# Allegro board PoFA1-2.brd
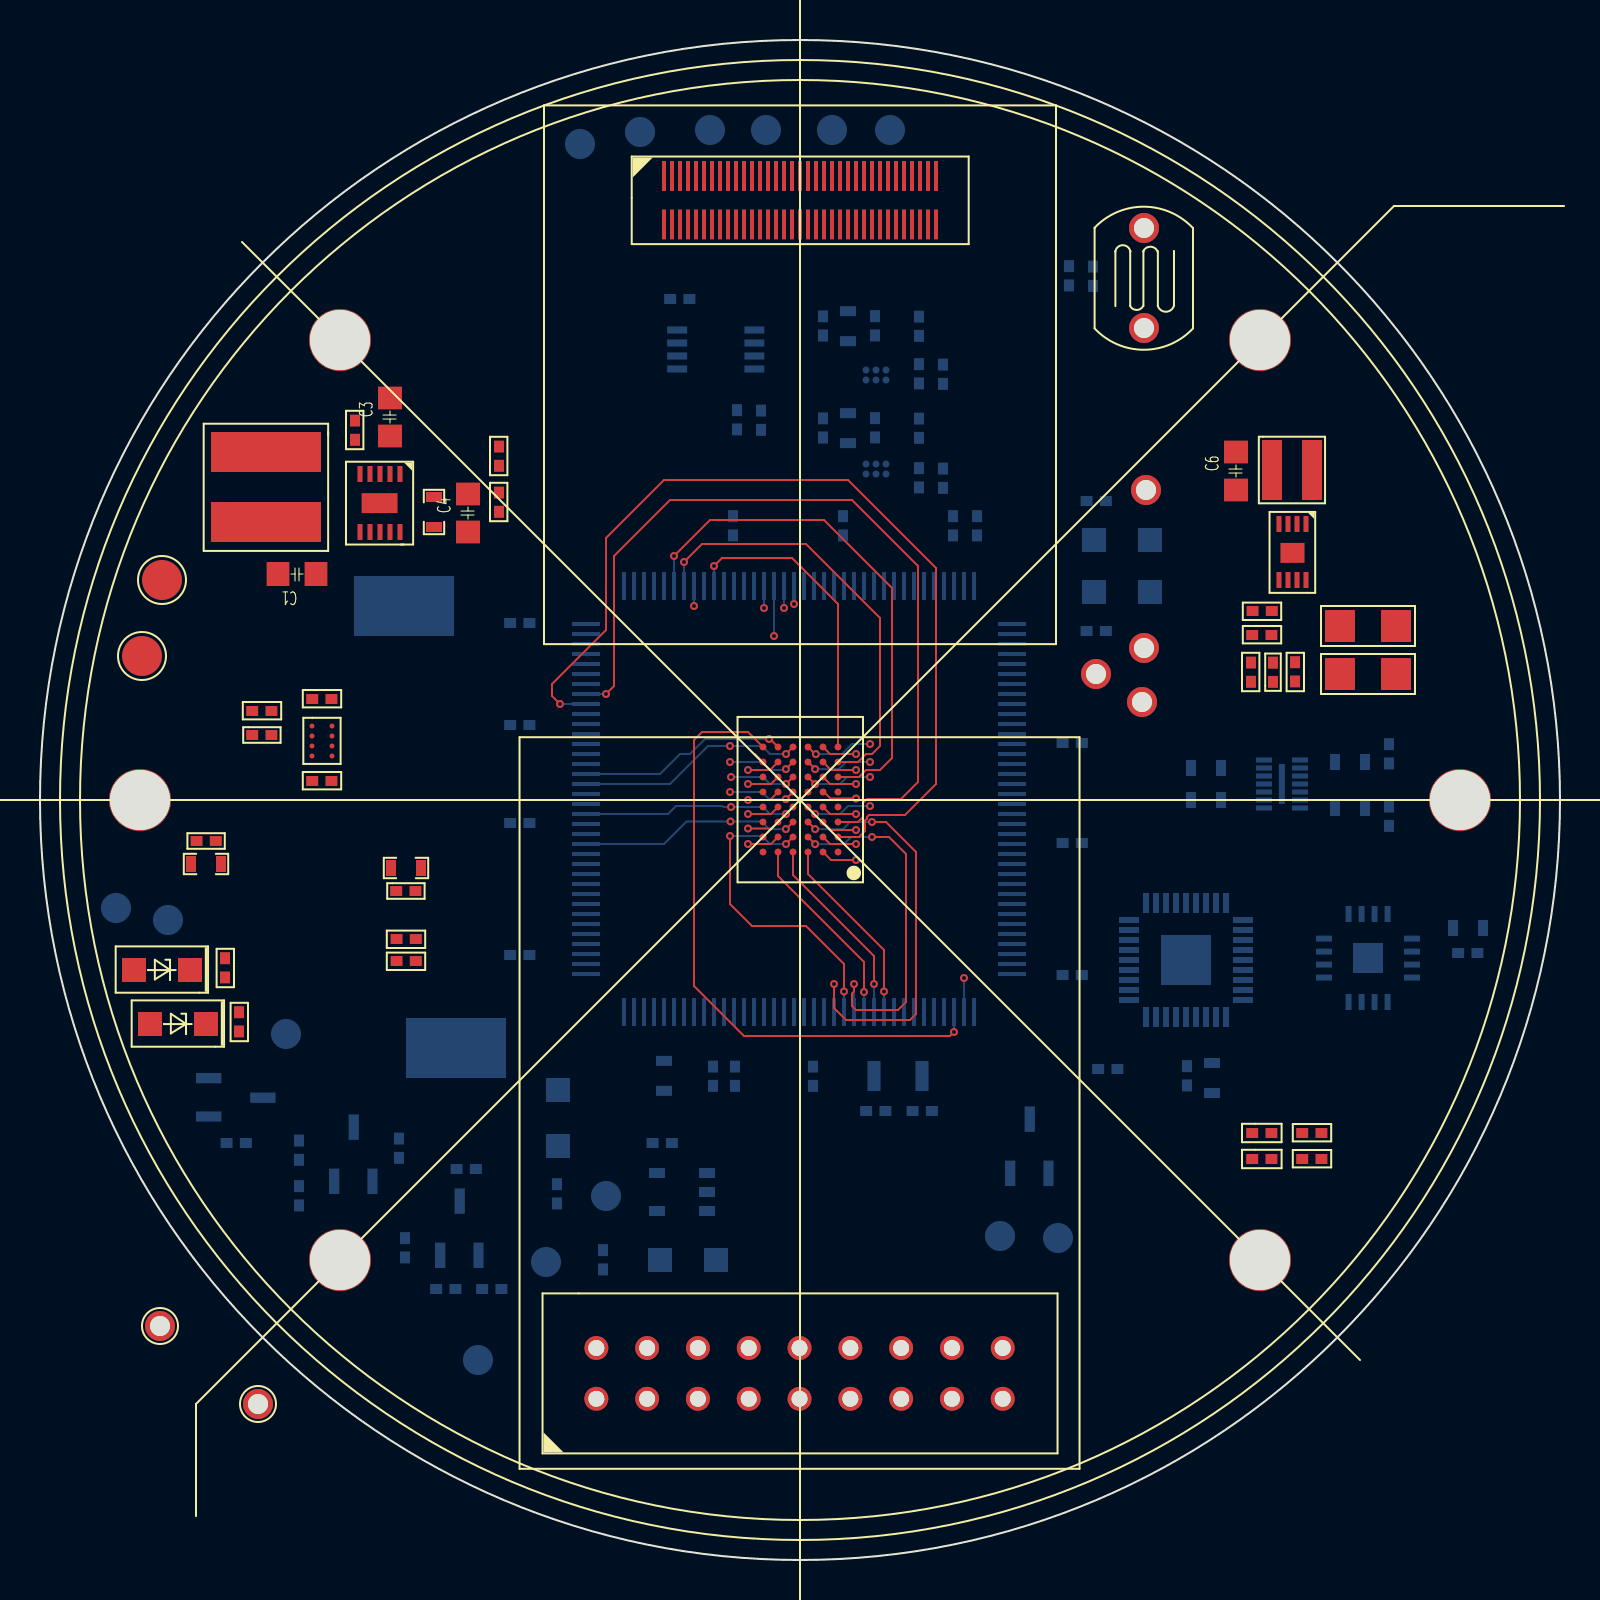
[diagram p0: board, top side]
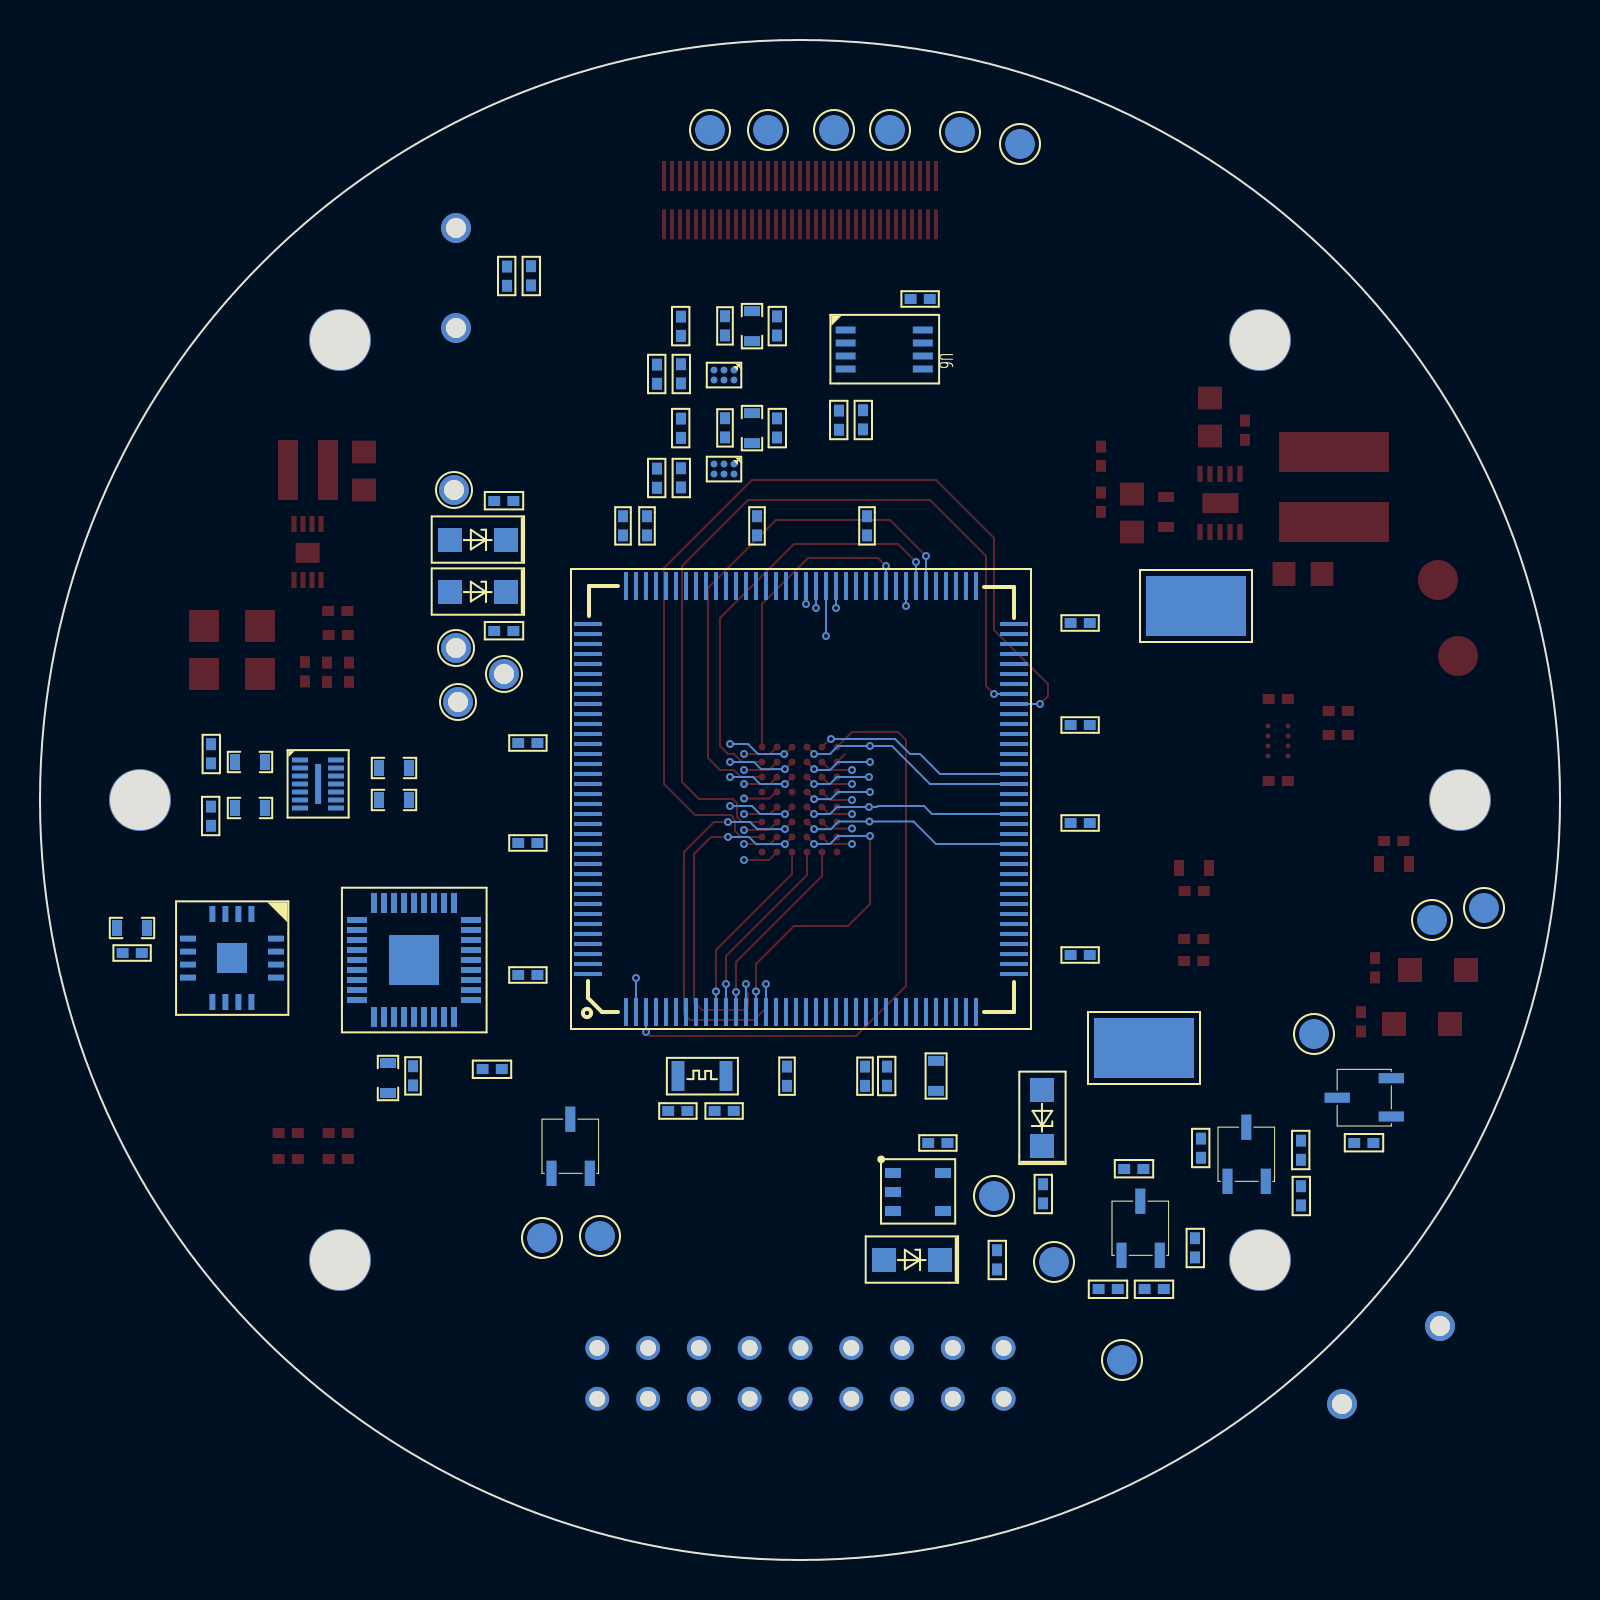
[diagram p1: board, bottom side, seen from below]

Outline 76 x 76 mm; copper layers: TOP, GND, VCC, BOTTOM. Coordinates in mm from the lower left corner of the outline.
Outline path: circle c38,38 r38

## Design rules (mm)
constraint set DEFAULT: min track width 0.1

## Placement (name value [footprint] x y rotation side)
C1  10uF  [C0805]  13.9 49.9 180 top
C2  1uF  [C0603]  20.1 51.6 90 top
C3  10uF  [C0805]  18.1 56.1 90 top
C4  10uF  [C0805]  22 51.3 90 top
C6  10uF  [C0805]  60.4 53.4 90 top
C7  33pF  [C0402]  61.9 43.89 90 top
C8  22uF  [C1206]  64.8 45.9 0 top
C9  22uF  [C1206]  64.8 43.5 0 top
C10  0.1uF  [C0402]  31.5 63.3 0 bottom
C11  2.2uF  [C0603]  40.8 62.5 270 bottom
C12  0.1uF  [C0402]  42 62.2 270 bottom
C13  1uF  [C0603]  66.3 39.5 180 bottom
C14  1uF  [C0603]  66.3 37.2 180 bottom
C15  1uF  [C0603]  59.1 39.2 180 bottom
C16  1uF  [C0603]  59.1 37.6 180 bottom
C17  2.2uF  [C0603]  40.8 57.39 270 bottom
C18  0.1uF  [C0402]  42 57.1 270 bottom
C19  10uF  [C0603]  9.1 35.2 180 top
C20  0.1uF  [C0402]  8.8 36.2 180 top
C21  0.1uF  [C0402]  17.8 33.2 0 top
C22  10uF  [C0603]  17.5 34.2 0 top
C23  0.1uF  [C0402]  57.6 24.7 270 bottom
C24  10uF  [C0603]  59 24.9 270 bottom
C25  0.1uF  [C0402]  31.6 20.6 180 bottom
C26  0.1uF  [C0402]  70.9 30.6 0 bottom
C27  10uF  [C0603]  70.6 32 0 bottom
C28  0.1uF  [C0402]  38.4 23.7 90 bottom
C29  0.1uF  [C0402]  52.1 29 180 bottom
C30  0.1uF  [C0402]  52.1 35.6 180 bottom
C31  0.1uF  [C0402]  52.1 40.6 180 bottom
C32  0.1uF  [C0402]  23.5 30.5 0 bottom
C33  0.1uF  [C0402]  23.5 37.1 0 bottom
C34  0.1uF  [C0402]  23.5 42 0 bottom
C35  0.1uF  [C0402]  23.5 47.1 0 bottom
C36  0.1uF  [C0402]  34.9 52.2 270 bottom
C37  0.1uF  [C0402]  40.4 52.2 270 bottom
C38  0.1uF  [C0402]  47.1 52.2 270 bottom
C39  0.1uF  [C0402]  45.9 52.2 270 bottom
C40  0.1uF  [C0402]  34.5 23.7 90 bottom
C41  12pF  [C0402]  41.3 22.7 0 bottom
C42  12pF  [C0402]  44.6 22.2 180 bottom
C43  0.1uF  [C0402]  10.6 41 0 top
D1  LED  [LED0402]  60.6 21.1 0 top
D2  LED  [LED0402]  60.6 19.8 0 top
D3  PTVS3V3S1UTR  [SOD123W]  31 15 0 bottom
D4  PTVS3V3S1UTR  [SOD123W]  25.9 20.7 90 bottom
D5  PTVS3V3S1UTR  [SOD123W]  8.3 26.8 180 top
D6  PTVS3V3S1UTR  [SOD123W]  7.5 29.5 180 top
D7  PTVS3V3S1UTR  [SOD123W]  52.7 51 0 bottom
D8  PTVS3V3S1UTR  [SOD123W]  52.7 48.4 0 bottom
J1  Header2x9-2.54mm  [HEADER2X9-2D54]  27.82 10.6 0 top
J2  DF40HC(3.0)-70DS-0.4V(51)  [DF40HC-70DS]  31.2 69.2 0 top
L1  10uH  [L47473]  11.3 55.4 270 top
L2  4.7uH  [L3015]  61.6 54.5 0 top
L3  1uH  [L0603]  31.6 25.01 270 bottom
NOREF  -  [unnamed]  5 38 0 top
NOREF#2  -  [unnamed]  15 15 0 top
NOREF#3  -  [unnamed]  71 38 0 top
NOREF#4  -  [unnamed]  15 61 0 top
NOREF#5  -  [unnamed]  61 61 0 top
NOREF#6  -  [unnamed]  61 15 0 top
Q1  2SC1815  [SOT23-3]  17.1 18.5 180 bottom
Q2  2SC1815  [SOT23-3]  22.4 14.8 180 bottom
Q3  FH3415A  [SOT23-3]  8 21.7 90 bottom
R1  200K  [R0402]  16 56 90 top
R2  2.26M  [R0402]  23.2 52.4 90 top
R3  1M  [R0402]  23.2 54.7 90 top
R4  10K  [R0402]  60.6 46 0 top
R5  562K  [R0402]  60.8 43.9 90 top
R6  1M  [R0402]  62.5 44.9 270 top
R8  1M  [R0402]  35.1 57.5 270 bottom
R9  1M  [R0402]  35.8 56.5 90 bottom
R10  36K  [R0402]  43.7 61.2 90 bottom
R11  10K  [R0402]  44.9 58.8 90 bottom
R12  147K  [R0402]  44.2 59.8 270 bottom
R13  3.3K  [R0402]  39.4 62.2 270 bottom
R14  100K  [R0402]  67.7 40.8 270 bottom
R15  100K  [R0402]  67.2 36.7 90 bottom
R17  GL7549  [AXIAL-5D0]  55.2 61.6 90 top
R19  3.3K  [R0402]  39.4 57.09 270 bottom
R20  10K  [R0402]  44.9 53.6 90 bottom
R21  36K  [R0402]  43.7 56.09 90 bottom
R22  147K  [R0402]  44.2 54.6 270 bottom
R23  10K  [R0402]  61.6 47.7 180 top
R24  1K  [R0402]  52.9 24.8 0 bottom
R25  510  [R0402]  13.2 18.7 270 bottom
R26  510  [R0402]  12.7 20 90 bottom
R27  40  [R0402]  18.5 16.1 270 bottom
R28  510  [R0402]  22.1 13.8 0 bottom
R29  510  [R0402]  19.8 13.8 0 bottom
R30  40  [R0402]  17.7 20.1 90 bottom
R31  510  [R0402]  21.8 19.3 180 bottom
R32  68K  [R0402]  51.7 64.7 270 bottom
R33  0  [R0402]  52.4 63.7 90 bottom
R34  0  [R0402]  18.8 31.3 180 top
R35  DNP  [R0402]  18.8 30.2 180 top
R36  2K  [R0402]  63.1 21.1 0 top
R37  2K  [R0402]  63.1 19.8 0 top
R38  10K  [R0402]  28.4 15.5 270 bottom
R39  10K  [R0402]  26.1 18.8 270 bottom
R40  10K  [R0402]  33.4 23.7 90 bottom
R41  10K  [R0402]  10.6 42.2 0 top
R42  10K  [R0402]  13.6 42.8 0 top
R43  10K  [R0402]  13.6 38.7 0 top
R44  10K  [R0402]  9.7 27.4 270 top
R45  10K  [R0402]  9 30.1 270 top
R46  10K  [R0402]  53.3 46.2 180 bottom
R47  10K  [R0402]  53.3 52.7 180 bottom
R48  10K  [R0402]  10.3 20.6 180 bottom
TP1  Solar Cell V+  [TP_SMD_OD2D0]  6.1 49 0 top
TP2  Solar Cell V-  [TP_SMD_OD2D0]  5.1 45.2 0 top
TP3  LED+  [TP_THR_ID1D0]  6 11.7 0 top
TP4  LED-  [TP_THR_ID1D0]  10.9 7.8 0 top
TP5  SMD TP  [TP_SMD_OD1D5]  25.3 14.9 180 bottom
TP6  SMD TP  [TP_SMD_OD1D5]  28.3 18.2 180 bottom
TP7  SMD TP  [TP_SMD_OD1D5]  21.9 10 180 bottom
TP8  SMD TP  [TP_THR_ID1D0]  52.8 44.3 180 bottom
TP9  SMD TP  [TP_THR_ID1D0]  55.2 45.6 180 bottom
TP10  SMD TP  [TP_THR_ID1D0]  55.3 53.5 180 bottom
TP11  SMD TP  [TP_THR_ID1D0]  55.1 42.9 180 bottom
TP12  SMD TP  [TP_SMD_OD1D5]  48 16.2 180 bottom
TP13  SMD TP  [TP_SMD_OD1D5]  50.9 16.1 180 bottom
TP14  SMD TP  [TP_SMD_OD1D5]  12.3 26.3 180 bottom
TP15  SMD TP  [TP_SMD_OD1D5]  6.4 32 180 bottom
TP16  SMD TP  [TP_SMD_OD1D5]  3.8 32.6 180 bottom
TP17  SMD TP  [TP_SMD_OD1D5]  27 70.8 180 bottom
TP18  SMD TP  [TP_SMD_OD1D5]  30 71.4 180 bottom
TP19  SMD TP  [TP_SMD_OD1D5]  33.5 71.5 180 bottom
TP20  SMD TP  [TP_SMD_OD1D5]  36.3 71.5 180 bottom
TP21  SMD TP  [TP_SMD_OD1D5]  39.6 71.5 180 bottom
TP22  SMD TP  [TP_SMD_OD1D5]  42.5 71.5 180 bottom
TP23  SOLDER POINT  [TP_SMD_3D0X5D0]  18.2 47.7 90 bottom
TP24  SOLDER POINT  [TP_SMD_3D0X5D0]  20.8 25.6 270 bottom
U1  LTC3105EDD#PBF  [DFN-10]  18 51.4 180 top
U2  LTC3539EDCB#PBF  [DFN-8]  63.3 49 180 top
U4  ADCMP380-1ACBZ-RL7  [WLCSP-6]  41.3 59.5 270 bottom
U5  TPS22976ADPUR  [WSON-14]  61.2 40 270 bottom
U6  ADA4051-2ARMZ  [RM-8]  32.1 61.5 270 bottom
U7  ADCMP380-1ACBZ-RL7  [WLCSP-6]  41.3 54.8 270 bottom
U8  IS66WVE2M16EBLL-70BLI-TR  [TFBGA-48]  39.9 35.4 180 top
U9  STM32L496ZGT6  [LQFP-144]  47.9 28.1 180 bottom
U10  MAX4761ETX+T  [TQFN-36]  57.3 30 90 bottom
U11  SN74LVC1G08QDBVRQ1  [SOT-23-5]  33.6 16.9 180 bottom
U13  BAT754C  [SOT23-3]  50.9 18.9 180 bottom
U14  HDC1010YPAR  [DSBGA-8]  13.6 41.7 0 top
U15  MAX4754AEBE+T  [QFN-16]  66.4 30.1 270 bottom
Y1  32.768KHz  [CRYSTAL_3215]  44.1 24.2 180 bottom

## Library data of the parts
C1-C4 C6-C43 = CAP NP
D1 D2 = LED
D3-D8 = DIODE TVS
J1 = Header2x9
J2 = Header2x35
L1-L3 = INDUCTOR
Q1 Q2 = 2SC1815
Q3 = FH3415A
R1-R6 R8-R15 R19-R48 = R
R17 = RESISTOR VAR 2
TP1-TP4 = T POINT A
TP5-TP22 = T POINT R
TP23 TP24 = T POINT S
U1 = LTC3105EDD#PBF
U2 = LTC3539EDCB#PBF
U4 U7 = ADCMP380-1ACBZ-RL7
U5 = TPS22976ADPUR
U6 = ADA4051-2ARMZ
U8 = IS66WVE2M16EBLL-70BLI-TR
U9 = STM32L496ZGT6
U10 = MAX4761EBX+T
U11 = SN74LVC1G08QDBVRQ1
U13 = BAT754C
U14 = HDC1010YPAR
U15 = MAX4754AEBE+T
Y1 = CRYSTAL

## Footprints (pads in the part's own frame, mm; a bottom-side part is the same pattern mirrored in y, then rotated)
AXIAL-5D0
  round 1.5 hole 1: 1(0,0) 2(5,0)
C0402
  rect 0.6x0.5 smd: 1(0.01,0.25) 2(0.97,0.25)
C0603
  rect 0.5x0.8 smd: 1(0.05,0.4) 2(1.55,0.4)
C0805
  rect 1.14x1.2 smd: 1(0.1,0.6) 2(2,0.6)
C1206
  rect 1.5x1.6 smd: 1(0.2,0.8) 2(3,0.8)
CRYSTAL_3215
  rect 0.65x1.5 smd: 1(0,0) 2(2.4,0)
DF40HC-70DS
  rect 0.2x1.5 smd: 1(0,0) 2(0.4,0) 3(0.8,0) 4(1.2,0) 5(1.6,0) 6(2,0) 7(2.4,0) 8(2.8,0) 9(3.2,0) 10(3.6,0) 11(4,0) 12(4.4,0) 13(4.8,0) 14(5.2,0) 15(5.6,0) 16(6,0) 17(6.4,0) 18(6.8,0) 19(7.2,0) 20(7.6,0) 21(8,0) 22(8.4,0) 23(8.8,0) 24(9.2,0) 25(9.6,0) 26(10,0) 27(10.4,0) 28(10.8,0) 29(11.2,0) 30(11.6,0) 31(12,0) 32(12.4,0) 33(12.8,0) 34(13.2,0) 35(13.6,0) 36(13.6,-2.42) 37(13.2,-2.42) 38(12.8,-2.42) 39(12.4,-2.42) 40(12,-2.42) 41(11.6,-2.42) 42(11.2,-2.42) 43(10.8,-2.42) 44(10.4,-2.42) 45(10,-2.42) 46(9.6,-2.42) 47(9.2,-2.42) 48(8.8,-2.42) 49(8.4,-2.42) 50(8,-2.42) 51(7.6,-2.42) 52(7.2,-2.42) 53(6.8,-2.42) 54(6.4,-2.42) 55(6,-2.42) 56(5.6,-2.42) 57(5.2,-2.42) 58(4.8,-2.42) 59(4.4,-2.42) 60(4,-2.42) 61(3.6,-2.42) 62(3.2,-2.42) 63(2.8,-2.42) 64(2.4,-2.42) 65(2,-2.42) 66(1.6,-2.42) 67(1.2,-2.42) 68(0.8,-2.42) 69(0.4,-2.42) 70(0,-2.42)
DFN-8
  rect 0.25x0.8 smd: 1(0,-2.8) 2(0.45,-2.8) 3(0.9,-2.8) 4(1.35,-2.8) 5(1.35,0) 6(0.9,0) 7(0.45,0) 8(0,0)
  rect 1.2x1 smd: 9(0.676,-1.355)
DFN-10
  rect 0.25x0.8 smd: 1(0,-2.9) 2(0.5,-2.9) 3(1,-2.9) 4(1.5,-2.9) 5(2,-2.9) 6(2,0) 7(1.5,0) 8(1,0) 9(0.5,0) 10(0,0)
  rect 1.8x1 smd: 11(1.022,-1.444)
DSBGA-8
  round 0.25 smd: A1(0,0) A2(1,0) B1(0,-0.5) B2(1,-0.5) C1(0,-1) C2(1,-1) D1(0,-1.5) D2(1,-1.5)
HEADER2X9-2D54
  round 1.2 hole 0.8: 1(0,-2.54) 2(2.54,-2.54) 3(5.08,-2.54) 4(7.62,-2.54) 5(10.16,-2.54) 6(12.7,-2.54) 7(15.24,-2.54) 8(17.78,-2.54) 9(20.32,-2.54) 10(20.32,0) 11(17.78,0) 12(15.24,0) 13(12.7,0) 14(10.16,0) 15(7.62,0) 16(5.08,0) 17(2.54,0) 18(0,0)
L0603
  rect 0.5x0.8 smd: 1(0.05,0.4) 2(1.55,0.4)
L3015
  rect 1x3 smd: 1(0,0) 2(2,0)
L47473
  rect 2x5.5 smd: 1(0,0) 2(3.5,0)
LED0402
  rect 0.6x0.5 smd: 1(0.01,0.25) 2(0.97,0.25)
LQFP-144
  rect 0.2x1.4 smd: 1(1.2,-0.7) 2(1.7,-0.7) 3(2.2,-0.7) 4(2.7,-0.7) 5(3.2,-0.7) 6(3.7,-0.7) 7(4.2,-0.7) 8(4.7,-0.7) 9(5.2,-0.7) 10(5.7,-0.7) 11(6.2,-0.7) 12(6.7,-0.7) 13(7.2,-0.7) 14(7.7,-0.7) 15(8.2,-0.7) 16(8.7,-0.7) 17(9.2,-0.7) 18(9.7,-0.7) 19(10.2,-0.7) 20(10.7,-0.7) 21(11.2,-0.7) 22(11.7,-0.7) 23(12.2,-0.7) 24(12.7,-0.7) 25(13.2,-0.7) 26(13.7,-0.7) 27(14.2,-0.7) 28(14.7,-0.7) 29(15.2,-0.7) 30(15.7,-0.7) 31(16.2,-0.7) 32(16.7,-0.7) 33(17.2,-0.7) 34(17.7,-0.7) 35(18.2,-0.7) 36(18.7,-0.7) 73(18.7,20.6) 74(18.2,20.6) 75(17.7,20.6) 76(17.2,20.6) 77(16.7,20.6) 78(16.2,20.6) 79(15.7,20.6) 80(15.2,20.6) 81(14.7,20.6) 82(14.2,20.6) 83(13.7,20.6) 84(13.2,20.6) 85(12.7,20.6) 86(12.2,20.6) 87(11.7,20.6) 88(11.2,20.6) 89(10.7,20.6) 90(10.2,20.6) 91(9.7,20.6) 92(9.2,20.6) 93(8.7,20.6) 94(8.2,20.6) 95(7.7,20.6) 96(7.2,20.6) 97(6.7,20.6) 98(6.2,20.6) 99(5.7,20.6) 100(5.2,20.6) 101(4.7,20.6) 102(4.2,20.6) 103(3.7,20.6) 104(3.2,20.6) 105(2.7,20.6) 106(2.2,20.6) 107(1.7,20.6) 108(1.2,20.6)
  rect 1.4x0.2 smd: 37(20.6,1.2) 38(20.6,1.7) 39(20.6,2.2) 40(20.6,2.7) 41(20.6,3.2) 42(20.6,3.7) 43(20.6,4.2) 44(20.6,4.7) 45(20.6,5.2) 46(20.6,5.7) 47(20.6,6.2) 48(20.6,6.7) 49(20.6,7.2) 50(20.6,7.7) 51(20.6,8.2) 52(20.6,8.7) 53(20.6,9.2) 54(20.6,9.7) 55(20.6,10.2) 56(20.6,10.7) 57(20.6,11.2) 58(20.6,11.7) 59(20.6,12.2) 60(20.6,12.7) 61(20.6,13.2) 62(20.6,13.7) 63(20.6,14.2) 64(20.6,14.7) 65(20.6,15.2) 66(20.6,15.7) 67(20.6,16.2) 68(20.6,16.7) 69(20.6,17.2) 70(20.6,17.7) 71(20.6,18.2) 72(20.6,18.7) 109(-0.7,18.7) 110(-0.7,18.2) 111(-0.7,17.7) 112(-0.7,17.2) 113(-0.7,16.7) 114(-0.7,16.2) 115(-0.7,15.7) 116(-0.7,15.2) 117(-0.7,14.7) 118(-0.7,14.2) 119(-0.7,13.7) 120(-0.7,13.2) 121(-0.7,12.7) 122(-0.7,12.2) 123(-0.7,11.7) 124(-0.7,11.2) 125(-0.7,10.7) 126(-0.7,10.2) 127(-0.7,9.7) 128(-0.7,9.2) 129(-0.7,8.7) 130(-0.7,8.2) 131(-0.7,7.7) 132(-0.7,7.2) 133(-0.7,6.7) 134(-0.7,6.2) 135(-0.7,5.7) 136(-0.7,5.2) 137(-0.7,4.7) 138(-0.7,4.2) 139(-0.7,3.7) 140(-0.7,3.2) 141(-0.7,2.7) 142(-0.7,2.2) 143(-0.7,1.7) 144(-0.7,1.2)
QFN-16
  rect 0.8x0.3 smd: 1(-2.2,0.97) 2(-2.2,0.32) 3(-2.2,-0.33) 4(-2.2,-0.98) 9(2.2,-0.98) 10(2.2,-0.33) 11(2.2,0.32) 12(2.2,0.97)
  rect 0.3x0.8 smd: 5(-0.97,-2.2) 6(-0.32,-2.2) 7(0.33,-2.2) 8(0.98,-2.2) 13(0.98,2.2) 14(0.33,2.2) 15(-0.32,2.2) 16(-0.97,2.2)
  rect 1.5x1.5 smd: EPAD(0,0)
R0402
  rect 0.6x0.5 smd: 1(0.01,0.25) 2(0.97,0.25)
RM-8
  rect 0.35x1 smd: 1(-0.001,-3.615) 2(0.649,-3.615) 3(1.299,-3.615) 4(1.949,-3.615) 5(1.949,0.241) 6(1.299,0.241) 7(0.649,0.241) 8(-0.001,0.241)
SOD123W
  rect 1.2x1.2 smd: 1(0,0) 2(2.8,0)
SOT23-3
  rect 0.51x1.27 smd: 1(0.476,0.434) 2(2.391,0.434) 3(1.415,3.142)
SOT-23-5
  rect 0.8x0.5 smd: 1(0.25,2.45) 2(0.25,1.5) 3(0.25,0.55) 4(2.75,0.55) 5(2.75,2.45)
TFBGA-48
  round 0.35 smd: A1(0,0) A2(0.75,0) A3(1.5,0) A4(2.25,0) A5(3,0) A6(3.75,0) B1(0,-0.75) B2(0.75,-0.75) B3(1.5,-0.75) B4(2.25,-0.75) B5(3,-0.75) B6(3.75,-0.75) C1(0,-1.5) C2(0.75,-1.5) C3(1.5,-1.5) C4(2.25,-1.5) C5(3,-1.5) C6(3.75,-1.5) D1(0,-2.25) D2(0.75,-2.25) D3(1.5,-2.25) D4(2.25,-2.25) D5(3,-2.25) D6(3.75,-2.25) E1(0,-3) E2(0.75,-3) E3(1.5,-3) E4(2.25,-3) E5(3,-3) E6(3.75,-3) F1(0,-3.75) F2(0.75,-3.75) F3(1.5,-3.75) F4(2.25,-3.75) F5(3,-3.75) F6(3.75,-3.75) G1(0,-4.5) G2(0.75,-4.5) G3(1.5,-4.5) G4(2.25,-4.5) G5(3,-4.5) G6(3.75,-4.5) H1(0,-5.25) H2(0.75,-5.25) H3(1.5,-5.25) H4(2.25,-5.25) H5(3,-5.25) H6(3.75,-5.25)
TP_SMD_3D0X5D0
  rect 3x5 smd: 1(0,0)
TP_SMD_OD1D5
  round 1.5 smd: 1(0,0)
TP_SMD_OD2D0
  round 2 smd: 1(0,0)
TP_THR_ID1D0
  round 1.5 hole 1: 1(0,0)
TQFN-36
  rect 1x0.3 smd: 1(-2.85,2) 2(-2.85,1.5) 3(-2.85,1) 4(-2.85,0.5) 5(-2.85,0) 6(-2.85,-0.5) 7(-2.85,-1) 8(-2.85,-1.5) 9(-2.85,-2) 19(2.85,-2) 20(2.85,-1.5) 21(2.85,-1) 22(2.85,-0.5) 23(2.85,0) 24(2.85,0.5) 25(2.85,1) 26(2.85,1.5) 27(2.85,2)
  rect 0.3x1 smd: 10(-2,-2.85) 11(-1.5,-2.85) 12(-1,-2.85) 13(-0.5,-2.85) 14(0,-2.85) 15(0.5,-2.85) 16(1,-2.85) 17(1.5,-2.85) 18(2,-2.85) 28(2,2.85) 29(1.5,2.85) 30(1,2.85) 31(0.5,2.85) 32(0,2.85) 33(-0.5,2.85) 34(-1,2.85) 35(-1.5,2.85) 36(-2,2.85)
  rect 2.5x2.5 smd: EPAD(0,0)
unnamed
  round 3.1 hole 3 unplated: (0,0)
WLCSP-6
  round 0.35 smd: A1(0,0) A2(0.5,0) B1(0,-0.5) B2(0.5,-0.5) C1(0,-1) C2(0.5,-1)
WSON-14
  rect 0.25x0.8 smd: 1(0,-1.8) 2(0.4,-1.8) 3(0.8,-1.8) 4(1.2,-1.8) 5(1.6,-1.8) 6(2,-1.8) 7(2.4,-1.8) 8(2.4,0) 9(2,0) 10(1.6,0) 11(1.2,0) 12(0.8,0) 13(0.4,0) 14(0,0)
  rect 2x0.3 smd: EPAD(1.197,-0.895)

## Nets
GND: C1.2 C2.2 C3.2 C4.2 C6.2 C8.2 C9.2 C10.2 C11.1 C12.1 C13.1 C14.1 C15.2 C16.2 C17.1 C18.1 C19.2 C20.2 C21.2 C22.2 C23.2 C24.2 C25.2 C26.2 C27.2 C28.1 C29.1 C30.1 C31.1 C32.1 C33.1 C34.1 C35.1 C36.1 C37.1 C38.1 C39.1 C40.1 C41.1 C42.1 C43.1 D3.2 D4.2 D5.2 D6.2 D7.2 D8.2 J1.18 J2.5 J2.6 J2.7 J2.8 J2.9 J2.11 J2.13 J2.14 J2.43 J2.44 J2.55 J2.56 J2.69 J2.70 R1.2 R3.2 R4.1 R5.1 R9.1 R14.1 R15.1 R26.2 R27.2 R28.2 R32.1 R35.1 TP2.1(TP) TP7.1(TP) TP11.1(TP) TP13.1(TP) TP16.1(TP) TP24.1(TP) U1.3 U1.11 U2.2 U2.3 U2.9 U4.A2 U4.B2 U5.11 U5.EPAD U6.4(V-) U7.A2 U7.B2 U8.D1 U8.E6 U9.16 U9.30(VSSA) U9.31 U9.38 U9.51 U9.61 U9.83 U9.94 U9.107 U9.120 U9.130 U9.138 U9.143 U10.22 U10.23 U10.EPAD U11.3 U14.B2 U14.C1 U14.D1 U15.5 U15.8 U15.14 U15.EPAD
VDD33: C7.1 C8.1 C9.1 C13.2 C14.2 C19.1 C20.1 C21.1 C22.1 C23.1 C24.1 C25.1 C26.1 C27.1 C28.2 C29.2 C30.2 C31.2 C32.2 C33.2 C34.2 C35.2 C36.2 C37.2 C38.2 C39.2 C43.2 L3.2 Q3.2(S) R6.2 R17.1 R19.1 R20.2 R34.1 R36.2 R37.2 R38.1 R40.1 R41.1 R42.1 R43.1 R45.1 R46.1 R47.1 R48.1 TP8.1(TP) U2.8(VOUT) U5.1 U5.2 U5.4 U5.6 U5.7 U8.D6 U8.E1 U9.17 U9.39 U9.52 U9.62 U9.72 U9.84 U9.95 U9.106 U9.108 U9.121 U9.131 U9.144 U10.5(V+) U11.5 U13.1 U14.B1(VDD) U15.6(V+)
VDD_CAM1: J1.1 U5.13 U5.14
VDD_CAM2: J2.1 J2.2 J2.3 J2.4 U5.8 U5.9(VOUT2#9)
VSS: U9.71
BUS_SWITCH: R24.1 U9.19
CAM1_D0: J1.15 U10.1
CAM1_D1: J1.5 U10.3
CAM1_D2: J1.14 U10.7
CAM1_D3: J1.6 U10.9
CAM1_D4: J1.13 U10.27
CAM1_D5: J1.7 U10.25
CAM1_D6: J1.12 U10.21
CAM1_D7: J1.8 U10.19
CAM1_HSYNC: J1.3 U15.16
CAM1_PCLK: J1.11 U15.4
CAM1_PWDN: J1.10 U9.29
CAM1_PWR_EN: R14.2 U5.3 U9.73
CAM1_RST: J1.4 U9.28
CAM1_VSYNC: J1.2(VSYNC) U15.12
CAM2_D0: J2.26 U10.33
CAM2_D1: J2.25 U10.34
CAM2_D2: J2.28 U10.12
CAM2_D3: J2.27 U10.13
CAM2_D4: J2.30 U10.31
CAM2_D5: J2.29 U10.30
CAM2_D6: J2.32 U10.16
CAM2_D7: J2.31 U10.15
CAM2_HSYNC: J2.39 U15.13
CAM2_KEY1: J2.48 TP22.1(TP)
CAM2_KEY2: J2.50 TP21.1(TP)
CAM2_KEY3: J2.52 TP20.1(TP)
CAM2_KEY4: J2.54 TP19.1(TP)
CAM2_PCLK: J2.41 U15.1
CAM2_PWR_EN: R15.2 U5.5 U9.74
CAM2_RS232_RX: J2.15 TP18.1(TP)
CAM2_RS232_TX: J2.16 TP17.1(TP)
CAM2_VSYNC: J2.40 U15.9
DAY_NIGHT: R20.1 R22.2 U7.C2 U9.27
DCMI_D0: U9.96 U10.36
DCMI_D1: U9.97 U10.2
DCMI_D2: U9.98 U10.8
DCMI_D3: U9.99 U10.10
DCMI_D4: U9.112 U10.28
DCMI_D5: U9.117 U10.26
DCMI_D6: U9.4 U10.20
DCMI_D7: U9.5 U10.18
DCMI_D8: J2.34 U9.111
DCMI_D9: J2.33 U9.113
DCMI_D10: J2.36 U9.122
DCMI_D11: J2.35 U9.22
DCMI_D12: J2.38 U9.49
DCMI_D13: J2.37 U9.132
DCMI_HSYNC: U9.40 U15.15
DCMI_PIXCLK: U9.42 U15.3
DCMI_VSYNC: U9.137 U15.11
FMC_A0: U8.A3 U9.10
FMC_A1: U8.A4 U9.11
FMC_A2: U8.A5 U9.12
FMC_A3: U8.B3 U9.13
FMC_A4: U8.B4 U9.14
FMC_A5: U8.C3 U9.15
FMC_A6: U8.C4 U9.50
FMC_A7: U8.D4 U9.53
FMC_A8: U8.H2 U9.54
FMC_A9: U8.H3 U9.55
FMC_A10: U8.H4 U9.56
FMC_A11: U8.H5 U9.57
FMC_A12: U8.G3 U9.87
FMC_A13: U8.G4 U9.88
FMC_A14: U8.F3 U9.89
FMC_A15: U8.F4 U9.90
FMC_A16: U8.E4 U9.80
FMC_A17: U8.D3 U9.81
FMC_A18: U8.H1 U9.82
FMC_A19: U8.G2 U9.2
FMC_A20: U8.H6 U9.3
FMC_D0: U8.B6 U9.85
FMC_D1: U8.C5 U9.86
FMC_D2: U8.C6 U9.114
FMC_D3: U8.D5 U9.115
FMC_D4: U8.E5 U9.58
FMC_D5: U8.F5 U9.59
FMC_D6: U8.F6 U9.60
FMC_D7: U8.G6 U9.63
FMC_D8: U8.B1 U9.64
FMC_D9: U8.C1 U9.65
FMC_D10: U8.C2 U9.66
FMC_D11: U8.D2 U9.67
FMC_D12: U8.E2 U9.68
FMC_D13: U8.F2 U9.77
FMC_D14: U8.F1 U9.78
FMC_D15: U8.G1 U9.79
FMC_NBL0: U8.A1 U9.141
FMC_NBL1: U8.B2 U9.142
FMC_NE1: U8.B5 U9.123
FMC_NOE: U8.A2 U9.118
FMC_NWE: U8.G5 U9.119
HT_DRDYN: R43.2 U9.46 U14.D2
I2C1_SCL: J1.17 U9.129
I2C1_SDA: J1.16 U9.128
I2C2_SCL: R41.2 U9.69 U14.A1
I2C2_SDA: R42.2 U9.70 U14.A2
I2C3_SCL: U9.43
LD_PWR_EN: Q3.1 R48.2 U9.92
LDO22: C3.1 C10.1 R11.2 R13.1 U1.2 U6.8
LED1: D1.1(CATHODE) U9.20
LED2: D2.1(CATHODE) U9.21
NC1: U10.6
NC2: U10.11
NC3: U10.14
NC4: U10.17
NC5: U10.24
NC6: U10.29
NC7: U10.32
NC8: U10.35
POR: C40.2 R40.2 U9.25
SWCLK: D8.1(CATHODE) R46.2 TP9.1(TP) U9.109
SWDIO: D7.1(CATHODE) R47.2 TP10.1(TP) U9.105
UART1_RX: D3.1(CATHODE) R38.2 TP5.1(TP) U9.102
UART1_TX: U9.101 U11.1 U11.2
UART2_RX: J2.46 U9.37
UART2_TX: J2.45 U9.36
UART3_RX: D6.1(CATHODE) R45.2 TP15.1(TP) U9.45
UART3_TX: R44.1 U9.44
UNDER_VOLTAGE: R11.1 R12.2 R23.1 U2.5 U4.C2
VCAP: C4.1 C6.1 L2.1 R2.1 R8.2 R23.2 TP23.1(TP) U1.9(VOUT) U2.4
VPHOTO: R17.2 R33.2 U6.5
N00115: L1.2 U1.7
N00127: C1.1 L1.1 TP1.1(TP) U1.4 U1.6
N00232: C2.1 U1.10
N00271: R1.1 U1.5
N00530: R2.2 R3.1 U1.1
N01950: R4.2 U2.7
N02509: L2.2 U2.1
N02830: C7.2 R5.2 R6.1 U2.6
N04876: R8.1 R9.2 U6.3
N06131: R10.1 R12.1 U4.C1
N06552: C11.2 R13.2 U4.A1(VCC)
N07653: C12.2 U4.B1
N11093: C16.1 U5.10
N11226: C15.1 U5.12
N13003: R10.2 U6.1 U6.2
N16448: C17.2 R19.2 U7.A1(VCC)
N16560: C18.2 U7.B1
N16602: R21.2 U6.6 U6.7
N16606: R21.1 R22.1 U7.C1
N57182: R24.2 U10.4 U15.2 U15.10
N66919: Q1.1 R25.2 R26.1 R31.2
N67019: Q3.3 R25.1 R29.1 R30.1 TP3.1(TP)
N67056: Q1.2(E) Q2.2(E) R27.1
N67360: Q2.1 R28.1 R29.2
N68906: Q2.3 TP4.1(TP)
N69262: Q1.3 R30.2
N70908: R31.1 R39.2 U11.4(Y)
N83192: R32.2 R33.1
N91897: R34.2 R35.2 U8.A6(ZZ#)
N107906: D1.2 R36.1
N107910: D2.2 R37.1
N112361: D4.1(CATHODE) R39.1 TP6.1(TP)
N118997: L3.1 U9.32 U9.33
N127292: U9.6 U13.3
N127671: TP12.1(TP) U13.2
N135275: C42.2 U9.8 Y1.1
N135282: C41.2 U9.9 Y1.2
N169854: D5.1(CATHODE) R44.2 TP14.1(TP)

Pads without a net: J1 9; J2 10 12 17 18 19 20 21 22 23 24 42 47 49 51 53 57 58 59 60 61 62 63 64 65 66 67 68; U1 8; U8 E3; U9 1 7 18 23 24 26 34 35 41 47 48 75 76 91 93 100 103 104 110 116 124 125 126 127 133 134 135 136 139 140; U14 C2; U15 7

## Via types
v1: diameter 0.4, hole 0.2, TOP to BOTTOM, 59 vias

## Routing (per net, layer and track width the routed paths; a pad name or vN(x,y) marks a point on that pad's centre or on a via; arc(x,y) is an arc through that point)
FMC_A0: length 9.6
  TOP w0.1: U8.A3 38.4,34.3 42.2,30.5 v1(42.2,28.43)
  BOTTOM w0.1: U9.10 v1(42.2,28.43)
FMC_A1: length 9.7
  TOP w0.1: U8.A4 37.65,34.25 41.7,30.2 v1(41.7,28.8)
  BOTTOM w0.1: v1(41.7,28.8) U9.11
FMC_A2: length 9.8
  TOP w0.1: v1(41.2,28.4) 41.2,29.9 36.9,34.2 U8.A5
  BOTTOM w0.1: v1(41.2,28.4) U9.12
FMC_A3: length 18.4
  TOP w0.1: v1(41.6,36.15) 42.45,36.15 43.3,35.3 43.3,27.9 42.9,27.5 40.8,27.5 40.6,27.7 40.6,28.32 40.7,28.42 v1(40.7,28.8) ; v1(38.76,35.8) U8.B3
  BOTTOM w0.1: v1(40.7,28.8) U9.13 ; v1(41.6,36.15) 40.55,36.15 40.2,35.8 v1(38.76,35.8)
FMC_A4: length 16.2
  TOP w0.1: v1(34.5,36.2) 34.5,32.8 35.6,31.7 38.3,31.7 40.2,29.8 v1(40.2,28.43) ; U8.B4 v1(37.3,35.8)
  BOTTOM w0.1: v1(37.3,35.8) 36.5,35.8 36.1,36.2 v1(34.5,36.2) ; v1(40.2,28.43) U9.14
FMC_A5: length 21.5
  TOP w0.1: v1(39.7,28.8) 39.7,27.6 40.3,27 43.5,27 43.8,27.3 43.8,35.4 42.3,36.9 v1(41.6,36.9) ; U8.C3 v1(38.76,36.55)
  BOTTOM w0.1: v1(41.6,36.9) 40.5,36.9 40.15,36.55 v1(38.76,36.55) ; v1(39.7,28.8) U9.15
FMC_A6: length 11.1
  TOP w0.1: v1(37.3,36.55) U8.C4
  BOTTOM w0.1: v1(37.3,36.55) 36.45,36.55 36.08,36.92 v1(34.52,36.92) 32.33,36.92 31.2,35.8 U9.50
FMC_A7: length 10.8
  TOP w0.1: U8.D4 v1(37.3,37.3)
  BOTTOM w0.1: U9.53 31.4,37.3 31.8,37.7 34.12,37.7 34.17,37.65 v1(34.55,37.65) 36.15,37.65 36.5,37.3 v1(37.3,37.3)
FMC_A8: length 1.8
  TOP w0.1: v1(40.8,40.3) 39.5,40.3 U8.H2
FMC_A9: length 3.5
  TOP w0.1: U8.H3 38.76,40.3 v1(38.8,40.3)
  BOTTOM w0.1: v1(38.8,40.3) 38.8,40.3 40.1,40.3 40.6,40.8 v1(41.5,40.8)
FMC_A10: length 11.4
  TOP w0.1: U8.H4 v1(37.3,40.3)
  BOTTOM w0.1: U9.56 31.5,38.8 33.4,40.7 v1(34.5,40.7) 36.1,40.7 36.5,40.3 v1(37.3,40.3)
FMC_A11: length 10.5
  TOP w0.1: U8.H5 36.5,41.05 36.45,41.05 v1(36.45,41.05)
  BOTTOM w0.1: U9.57 31,39.3 32,40.3 32.5,40.3 33.25,41.05 36.07,41.05 36.07,41.05 v1(36.45,41.05)
FMC_A12: length 4.5
  TOP w0.1: v1(38.76,39.55) U8.G3
  BOTTOM w0.1: v1(36.2,47.6) U9.87 ; v1(38.76,39.55) 39.95,39.55 40.3,39.9 v1(41.5,39.9)
FMC_A13: length 6
  TOP w0.1: U8.G4 v1(37.3,39.55)
  BOTTOM w0.1: v1(36.7,46.2) U9.88 ; v1(34.5,39.9) 36.1,39.9 36.5,39.5 37.25,39.5 v1(37.3,39.55)
FMC_A14: length 4.5
  TOP w0.1: U8.F3 v1(38.76,38.8)
  BOTTOM w0.1: v1(38.76,38.8) 38.76,38.8 40,38.8 40.35,39.15 v1(41.5,39.15) ; v1(37.2,47.6) U9.89
FMC_A15: length 4.3
  TOP w0.1: U8.F4 v1(37.3,38.8)
  BOTTOM w0.1: v1(37.3,38.8) 36.5,38.8 36.15,39.15 v1(34.55,39.15) ; v1(37.7,47.8) U9.90
FMC_A16: length 4.4
  TOP w0.1: v1(37.3,38.05) U8.E4
  BOTTOM w0.1: v1(37.3,38.05) 36.45,38.05 36.1,38.4 v1(34.5,38.4) ; v1(32.7,47.7) U9.80
FMC_A17: length 3.4
  TOP w0.1: v1(38.76,37.3) U8.D3
  BOTTOM w0.1: v1(38.76,37.3) 38.76,37.3 40,37.3 40.4,37.7 v1(41.5,37.7)
FMC_A18: length 15.5
  TOP w0.1: U8.H1 39.9,47.8 37.6,50.1 34.1,50.1 v1(33.7,49.7)
  BOTTOM w0.1: v1(33.7,49.7) U9.82
FMC_A19: length 3.5
  TOP w0.1: v1(40.8,39.5) 39.55,39.5 U8.G2
  BOTTOM w0.1: v1(46.2,29.1) U9.2
FMC_A20: length 31.3
  TOP w0.1: U8.H6 35.4,41.4 33.1,41.4 32.7,41 32.7,28.7 35.2,26.2 45.5,26.2 v1(45.7,26.4)
  BOTTOM w0.1: v1(45.7,26.4) U9.3
FMC_D1: length 1.6
  TOP w0.1: v1(35.4,36.58) 36.58,36.58 U8.C5
FMC_D3: length 1.6
  TOP w0.1: v1(35.4,37.3) 36.55,37.3 U8.D5
FMC_D4: length 1.7
  TOP w0.1: U8.E5 36.5,38 v1(35.4,38)
FMC_D5: length 1.6
  TOP w0.1: U8.F5 36.55,38.8 v1(35.4,38.8)
FMC_D7: length 0.6
  TOP w0.1: U8.G6 35.75,40.3
FMC_D8: length 47.6
  TOP w0.1: U8.B1 40.95,36.15 41.25,36.45 41.25,36.97 41.35,37.07 41.35,37.15 41.45,37.25 43.25,37.25 44.8,38.8 44.8,49.6 40.4,54 31.2,54 28.3,51.1 28.3,46.5 25.6,43.8 25.6,43.2 v1(26,42.8)
  BOTTOM w0.1: v1(26,42.8) U9.64
FMC_D9: length 41.8
  TOP w0.1: v1(28.3,43.3) 28.7,43.7 28.7,50.2 31.5,53 40.6,53 43.9,49.7 43.9,38.9 43.05,38.05 41.35,38.05 41.15,37.84 41.15,37.16 40.9,36.9 U8.C1
  BOTTOM w0.1: v1(28.3,43.3) U9.65
FMC_D10: length 1.8
  TOP w0.1: v1(40.8,36.5) 39.55,36.5 U8.C2
FMC_D11: length 1.8
  TOP w0.1: U8.D2 39.5,37.3 v1(40.8,37.3)
FMC_D12: length 1.8
  TOP w0.1: U8.E2 39.2,38.4 39.52,38.08 v1(40.8,38.08)
FMC_D13: length 1.8
  TOP w0.1: v1(40.8,38.8) 39.5,38.8 U8.F2
FMC_D14: length 26.1
  TOP w0.1: v1(31.7,50.2) 33.5,52 39.2,52 42.6,48.6 42.6,40.1 42,39.5 41.3,39.5 40.95,39.15 U8.F1
  BOTTOM w0.1: v1(31.7,50.2) U9.78
FMC_D15: length 21.7
  TOP w0.1: U8.G1 40.9,39.9 41.3,40.3 41.6,40.3 42,40.7 42,47.1 38.3,50.8 33.1,50.8 v1(32.2,49.9)
  BOTTOM w0.1: v1(32.2,49.9) U9.79
FMC_NBL1: length 1.8
  TOP w0.1: v1(40.8,35.8) 39.5,35.8 U8.B2
FMC_NE1: length 1.6
  TOP w0.1: U8.B5 36.55,35.8 v1(35.4,35.8)
FMC_NOE: length 1.8
  TOP w0.1: v1(40.8,35) 39.55,35 U8.A2
FMC_NWE: length 1.7
  TOP w0.1: v1(35.4,39.5) 36.5,39.5 U8.G5
